# Altium PCB PCB1.PcbDoc
Units mil, origin at the board's own origin, x right, y up, seen from the top; angles counter-clockwise.
Board outline 2195 x 1920 mil, 2 copper layers (Top Layer, Bottom Layer); 18 components, 21 nets, 61 pads, 1 vias.
Unrouted connection lines stored in the file: 8.
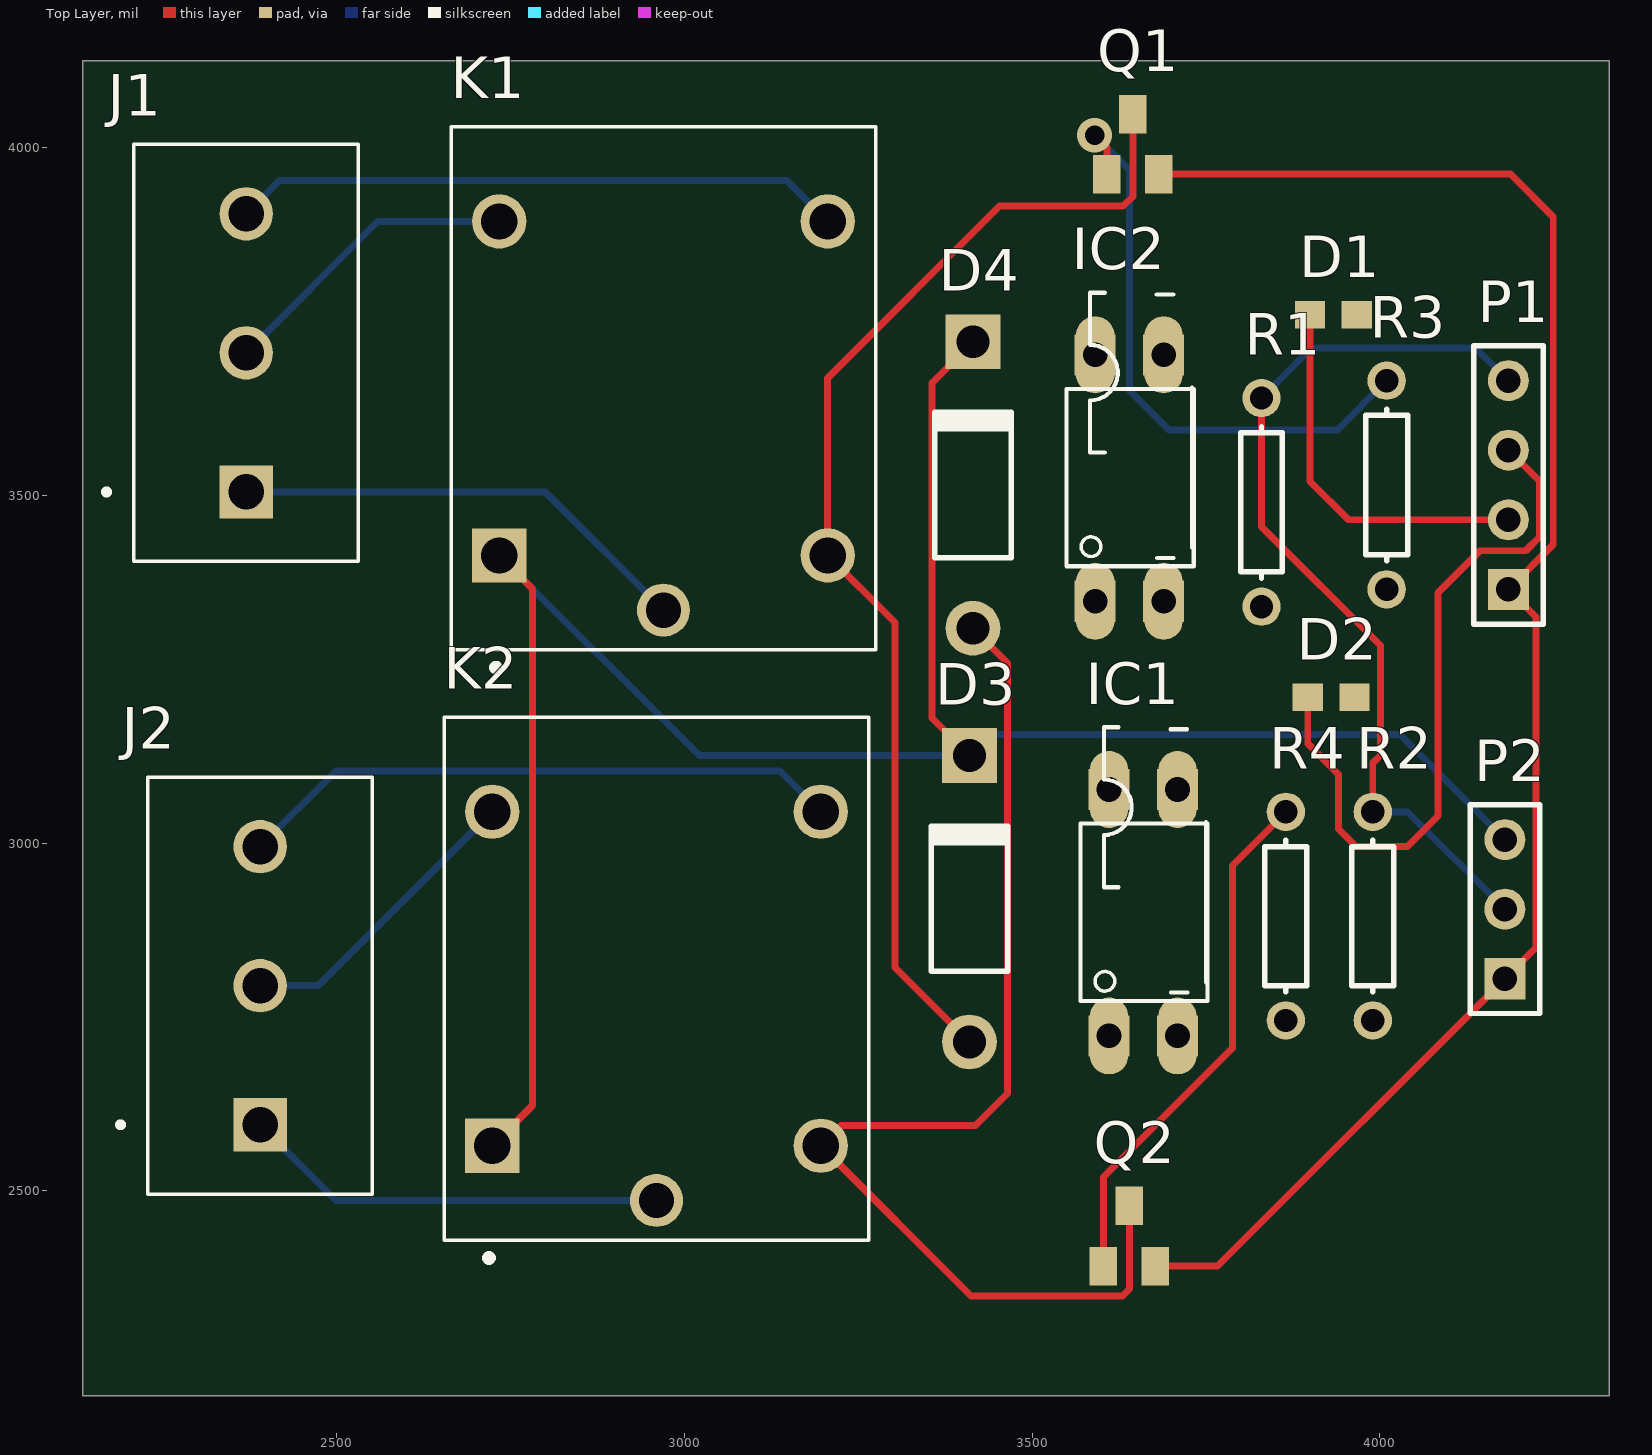
[diagram p0: Top Layer view]
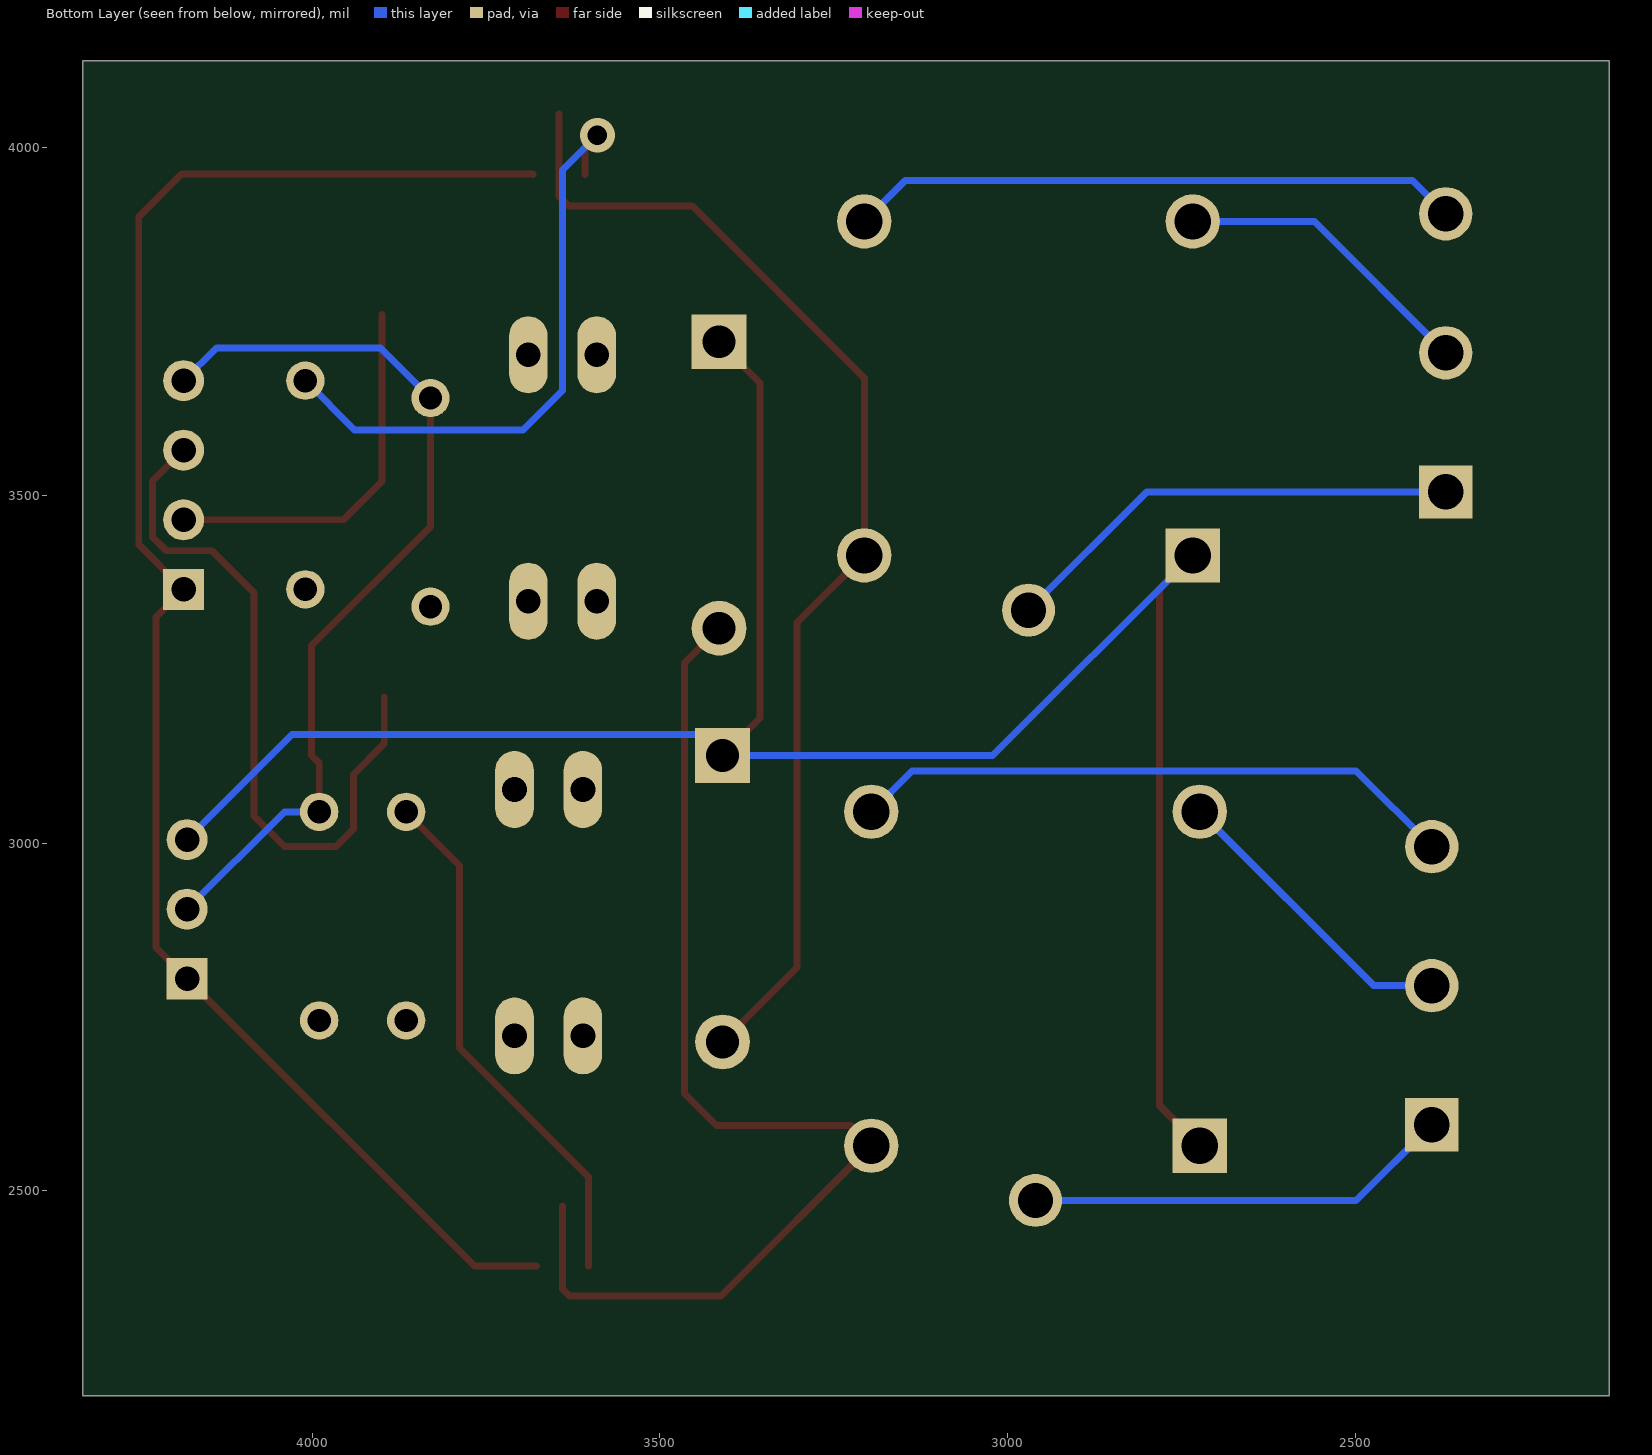
[diagram p1: Bottom Layer view, seen from below]

## Layer stack, top to bottom
Top Solder: solder mask 0.4, Solder Resist, Dk 3.5
Top Layer: signal copper 1.4
Dielectric 1: dielectric 12.6, FR-4, Dk 4.8
Bottom Layer: signal copper 1.4
Bottom Solder: solder mask 0.4, Solder Resist, Dk 3.5

## Board outline
2135,2205 4330,2205 4330,4125 2135,4125

## Design rules (kind name [scope] priority, off if disabled: settings)
Clearance [All] p1: gap=10 ignorepadtopadclearanceinfootprint=FALSE except(0: Arc-Hole Track-Hole SMDPad-Hole THPad-Hole Via-Hole Fill-Hole Poly-Hole Region-Hole Text-Hole)
PolygonConnect [All] p1: connectstyle=Relief reliefconductorwidth=10 reliefentries=4 polygonreliefangle="90 Angle" airgapwidth=10
RoutingVias [All] p1: holewidth=28 width=50 viastyle="Through Hole" minholewidth=28 minwidth=50 maxholewidth=28 maxwidth=50
SolderMaskExpansion [All] p1: expansion=4 istentingtop=FALSE
Width [All] p1: maxlimit=10 minlimit=10 preferedwidth=10
30 further rules are at their usual default settings.

## Components (designator, comment, footprint, x,y, rotation, side; value= is the part's Value field where it differs from the comment)
D1 "LTST-C193TBKT-5A" 0603 3933.46,3760 r0 top
D2 "LTST-C193TBKT-5A" 0603 3930,3210 r0 top
D3 "Diode 1N4003" DO-41 3410,2920 r90 top
D4 "Diode 1N4003" DO-41 3415,3515 r90 top
IC1 "LTV-817" DIP-4 3660,2900 r0 top
IC2 "LTV-817" DIP-4 3640,3525 r0 top
J1 "TB006-508-03BE" CUI_TB006-508-03BE 2370,3505 r90 top
J2 "TB006-508-03BE" CUI_TB006-508-03BE 2390,2595 r90 top
K1 "SRD-05VDC-SL-C" RELAY_SRD-05VDC-SL-C 2970,3653.9 r90 top
K2 "SRD-05VDC-SL-C" RELAY_SRD-05VDC-SL-C 2960,2805 r90 top
P1 "Header 4" HDR1X4 4185,3365 r90 top
P2 "Header 3" HDR1X3 4180,2805 r90 top
Q1 "BCW31*" SOT23-BEC 3645,4005 r0 top
Q2 "BCW31*" SOT23-BEC 3640,2435 r0 top
R1 "Res1" AXIAL-0.3 3830,3490 r90 top value=1K
R2 "Res1" AXIAL-0.3 3990,2895 r90 top value=1K
R3 "Res1" AXIAL-0.3 4010,3515 r90 top value=1K
R4 "Res1" AXIAL-0.3 3865,2895 r90 top value=1K

## Footprints (in the part's own frame and the unit in brackets; to place one, negate y for a bottom-side part, rotate by r counter-clockwise, add the part's x,y. Pads: shape width x height; smd on the part's side, far side on the other; paste and mask are expansions set on the pad)
0603 [mm]
  rect 1.1x1 smd: 1(-0.85,0) 2(0.85,0)
  body extent -0.8,-0.4 0.8,0.4, height 0.35
AXIAL-0.3 [mm] "Axial Device, Thru-Hole; 2 Leads; 0.3 in Pin Spacing"
  round 1.4 hole 0.85: 1(-3.81,0) 2(3.81,0)
  silkscreen extent -2.77,-0.76 2.77,0.76
CUI_TB006-508-03BE [mm]
  rect 1.95x1.95 / inner round 1.95 / far side rect 1.95x1.95 hole 1.3: 1(0,0)
  round 1.95 hole 1.3: 2(5.08,0) 3(10.16,0)
  silkscreen extent -2.54,-4.1 12.7,5.2, body extent -3.04,-4.1 12.7,4.1, height 10
DIP-4 [mm]
  rect 1.5x1.5 smd: 1(-1.25,-4.5) 2(1.25,-4.5) 3(1.25,4.5) 4(-1.25,4.5)
  oval 1.408x2.816 hole 0.9: P$1(-1.25,-4.5) P$2(1.25,-4.5) P$3(1.25,4.5) P$4(-1.25,4.5)
  silkscreen extent -2.29,-3.22 2.35,6.77, body extent -2.19,-4.53 2.41,4.53, height 5.25
DO-41 [mm] "Diode, Axial; Body 5.2 x 2.7 mm (LxDia. max), Lead Dia. 0.86 mm (max)"
  round 2 hole 1.2: 1(-5.23,0)
  rect 2x2 hole 1.2: 2(5.23,0)
  silkscreen extent -2.65,-1.4 2.75,1.4
HDR1X3 [mm] "Connector; Header; 3 Position"
  rect 1.5x1.5 hole 0.9: 1(0,0)
  round 1.5 hole 0.9: 2(2.54,0) 3(5.08,0)
  silkscreen extent -1.27,-1.27 6.35,1.27
HDR1X4 [mm] "Connector; Header; 4 Position"
  rect 1.5x1.5 hole 0.9: 1(0,0)
  round 1.5 hole 0.9: 2(2.54,0) 3(5.08,0) 4(7.62,0)
  silkscreen extent -1.27,-1.27 8.89,1.27
RELAY_SRD-05VDC-SL-C [mm]
  rect 1.98x1.98 / inner round 1.98 / far side rect 1.98x1.98 hole 1.32: A1(-6.1,6)
  round 1.98 hole 1.32: A2(-6.1,-6) NC(6.1,6) NO(6.1,-6)
  round 1.935 hole 1.29: COM(-8.1,0)
  silkscreen extent -10.3,-7.75 9.55,7.75, body extent -9.6,-7.8 9.6,7.8, height 15.8
SOT23-BEC [mm]
  rect 1x1.4 smd: B(-0.95,-1.1) C(0,1.1) E(0.95,-1.1)
  body extent -1.45,-1.33 1.45,1.07, height 1.14

## Part data
D1 D2: "Blue 470nm LED Indication - Discrete 2.8V 0603 _1608 Metric_", Package="0603 Lite-On", Digi-Key_Part_Number=160-1827-1-ND, Digi-Key_Purchase_URL=https://www.digikey.com/product-detail/en/lite-on-inc/LTST-C193TBKT-5A/160-1827-1-ND/2355044?utm_source=snapeda&utm_medium=aggregator&utm_campaign=symbol, MF="Lite-On Inc.", MP=LTST-C193TBKT-5A, SnapEDA_Link=https://www.snapeda.com/parts/LTST-C193TBKT-5A/Lite-On%20Inc./view-part/350303/?ref=snap
D3 D4: "1 Amp General Purpose Rectifier", Code_JEDEC=DO-204-AL, ComponentLink1Description="Manufacturer Link", ComponentLink1URL=http://www.fairchildsemi.com/, ComponentLink2Description=Datasheet, ComponentLink2URL=http://www.fairchildsemi.com/ds/1N%2F1N4001.pdf, DatasheetVersion=1998, LatestRevisionDate=17-Jul-2002, LatestRevisionNote="Re-released for DXP Platform.", PackageDescription="Diode, Axial; Body 5.2 x 2.7 mm (LxDia. max), Lead Dia. 0.86 mm (max)", PackageReference=DO-41, PackageVersion=Aug-1999, Published=8-Jun-2000, Publisher="Altium Limited"
IC1 IC2: "Optoisolator Transistor Output 5000Vrms 1 Channel 4-SMD", Package="DIP-4 Lite-On Electronics", Availability=Unavailable, MF="Lite-On Electronics", MP=LTV-817, Price=None, SnapEDA_Link=https://www.snapeda.com/parts/LTV-817/ICS/view-part/4478599/?ref=snap
J1 J2: "2~24 Poles, Screw Type, Horizontal, 5.08 Pitch, 26~14 (AWG), Terminal Block Connector", Package=None, Availability="In Stock", Check_prices=https://www.snapeda.com/parts/TB006-508-03BE/CUI+Devices/view-part/?ref=eda, CUI_purchase_URL=https://www.cuidevices.com/product/interconnect/connectors/terminal-blocks/tb006-508-series?utm_source=snapeda.com&utm_medium=referral&utm_campaign=snapedaBOM, MF="CUI Devices", MP=TB006-508-03BE, Price=None, Purchase-URL=https://pricing.snapeda.com/search/part/TB006-508-03BE/?ref=eda, SnapEDA_Link=https://www.snapeda.com/parts/TB006-508-03BE/CUI+Devices/view-part/?ref=snap
K1 K2: "5V Trigger Relay Module For Arduino And Raspberry Pi 5V Trigger Relay Module For Arduino And Raspberry Pi", Package="NON STANDARD-5 Songle Relay", Availability="Not in stock", Check_prices=https://www.snapeda.com/parts/SRD-05VDC-SL-C/Songle+Relay/view-part/?ref=eda, MF="Songle Relay", MP=SRD-05VDC-SL-C, Price=None, SnapEDA_Link=https://www.snapeda.com/parts/SRD-05VDC-SL-C/Songle+Relay/view-part/?ref=snap
P1: "Header, 4-Pin", LatestRevisionDate=17-Jul-2002, LatestRevisionNote="Re-released for DXP Platform.", Publisher="Altium Limited"
P2: "Header, 3-Pin", LatestRevisionDate=17-Jul-2002, LatestRevisionNote="Re-released for DXP Platform.", Publisher="Altium Limited"
Q1 Q2: "Bipolar _BJT_ Transistor NPN General Purpose Amplifier Surface Mount", Package="SOT-23 ON Semiconductor", Availability=Unavailable, MF="ON Semiconductor", MP=BCW31, Price=None, SnapEDA_Link=https://www.snapeda.com/parts/BCW31/ON%20Semiconductor/view-part/573820/?ref=snap
R1 R2 R3 R4: "Resistor", LatestRevisionDate=17-Jul-2002, LatestRevisionNote="Re-released for DXP Platform.", PackageDescription="Axial Device, Thru-Hole; 2 Leads; 0.3 in Pin Spacing", PackageReference=AXIAL-0.3, Published=8-Jun-2000, Publisher="Altium Limited"

## Via types
v1: diameter 50, hole 28, Top Layer to Bottom Layer, 1 vias

## Nets (pads, with @x,y where several pads share a name; then routed paths per layer and width w, separated by ;. In a path a pad name is that pad's centre, name@x,y a point inside that pad or via, vN(x,y) a via of type N, cw(c..) or ccw(c..) an arc to the next point about the centre after c; other vN are vias at no path point)
GND: P1.1 P2.1 Q1.E Q2.E | length 2424.3
  Top Layer w10: Q2.E 3677.4,2392 3767,2392 P2.1 4225,2850 4225,3325 P1.1 4249.53,3429.53 4249.53,3900.47 4188,3962 3682.4,3962 Q1.E
IN1: D2.1 P1.3 | length 1023.1
  Top Layer w10: D2.1 3896.54,3143 3941,3098.54 3941,3020 3966,2995 4040,2995 4084,3039 4084,3360 4144.47,3420.47 4210,3420.47 4229.53,3440 4229.53,3520.47 P1.3
IN2: D1.1 P1.2 | length 547.8
  Top Layer w10: D1.1 3900,3520 3955,3465 P1.2
NetD1_2: D1.2 IC1.2
NetD2_2: D2.2 IC2.2
NetD3_1: D3.1 K1.A2 Q1.C | length 1704.5
  Top Layer w10: D3.1 3303,2821.09 3303,3316.96 K1.A2 3206.22,3669 3453.22,3916 3631,3916 3645,3930 Q1.C
NetD4_1: D4.1 K2.A2 Q2.C | length 1646.4
  Top Layer w10: D4.1 3465,3259.09 3465,2640 3419,2594 3225.38,2594 K2.A2 3412.06,2349 3630,2349 3640,2359 Q2.C
NetIC1_1: IC1.1 R1.1
NetIC1_3: IC1.3 R3.1
NetIC2_1: IC2.1 R2.1
NetIC2_3: IC2.3 R4.1
NetJ1_1: J1.1 K1.COM | length 670.4
  Bottom Layer w10: J1.1 2800,3505 K1.COM
NetJ1_2: J1.2 K1.NC | length 442.1
  Bottom Layer w10: J1.2 2559.06,3894.06 K1.NC
NetJ1_3: J1.3 K1.NO | length 880.5
  Bottom Layer w10: J1.3 2418,3953 3147.28,3953 K1.NO
NetJ2_1: J2.1 K2.COM | length 615.1
  Bottom Layer w10: J2.1 2498.9,2486.1 K2.COM
NetJ2_2: J2.2 K2.NC | length 437.4
  Bottom Layer w10: J2.2 2473.62,2795 K2.NC
NetJ2_3: J2.3 K2.NO | length 875.7
  Bottom Layer w10: J2.3 2499,3104 3137.38,3104 K2.NO
NetQ1_B: Q1.B R3.2 | length 874.3
  Top Layer w10: v1(3590,4018) 3607.6,4000.4 Q1.B
  Bottom Layer w10: v1(3590,4018) 3640,3968 3640,3651 3697,3594 3939,3594 R3.2
NetQ2_B: Q2.B R4.2 | length 762
  Top Layer w10: Q2.B 3602.6,2520 3788,2705.4 3788,2968 R4.2
"RY VCC": D3.2 D4.2 IC1.4 IC2.4 K1.A1 K2.A1 P2.3 | length 3192.9
  Top Layer w10: K2.A1 2782,2623.06 2782,3365.52 K1.A1 ; D3.2 3356,3179.91 3356,3661.91 D4.2
  Bottom Layer w10: K1.A1 3021.61,3125.91 D3.2 3410,3156 4029,3156 P2.3
VCC: P1.4 P2.2 R1.2 R2.2 | length 1322.7
  Top Layer w10: R1.2 3830,3455 4001,3284 4001,3126 3990,3115 R2.2
  Bottom Layer w10: R1.2 3902,3712 4138,3712 P1.4 ; R2.2 4040,3045 P2.2
pads on no net: IC1.P$1 IC1.P$2 IC1.P$3 IC1.P$4 IC2.P$1 IC2.P$2 IC2.P$3 IC2.P$4